# Altium PCB 06-7Segment(MAX7219).PcbDoc
Units mm, origin at the board's own origin, x right, y up, seen from the top; angles counter-clockwise.
Board outline 40 x 40 mm, 4 copper layers (Top Layer, Internal Plane 1, Internal Plane 2, Bottom Layer), stack 0.462 mm thick; 14 components, 29 nets, 93 pads, 16 vias.
Unrouted connection lines stored in the file: 50.
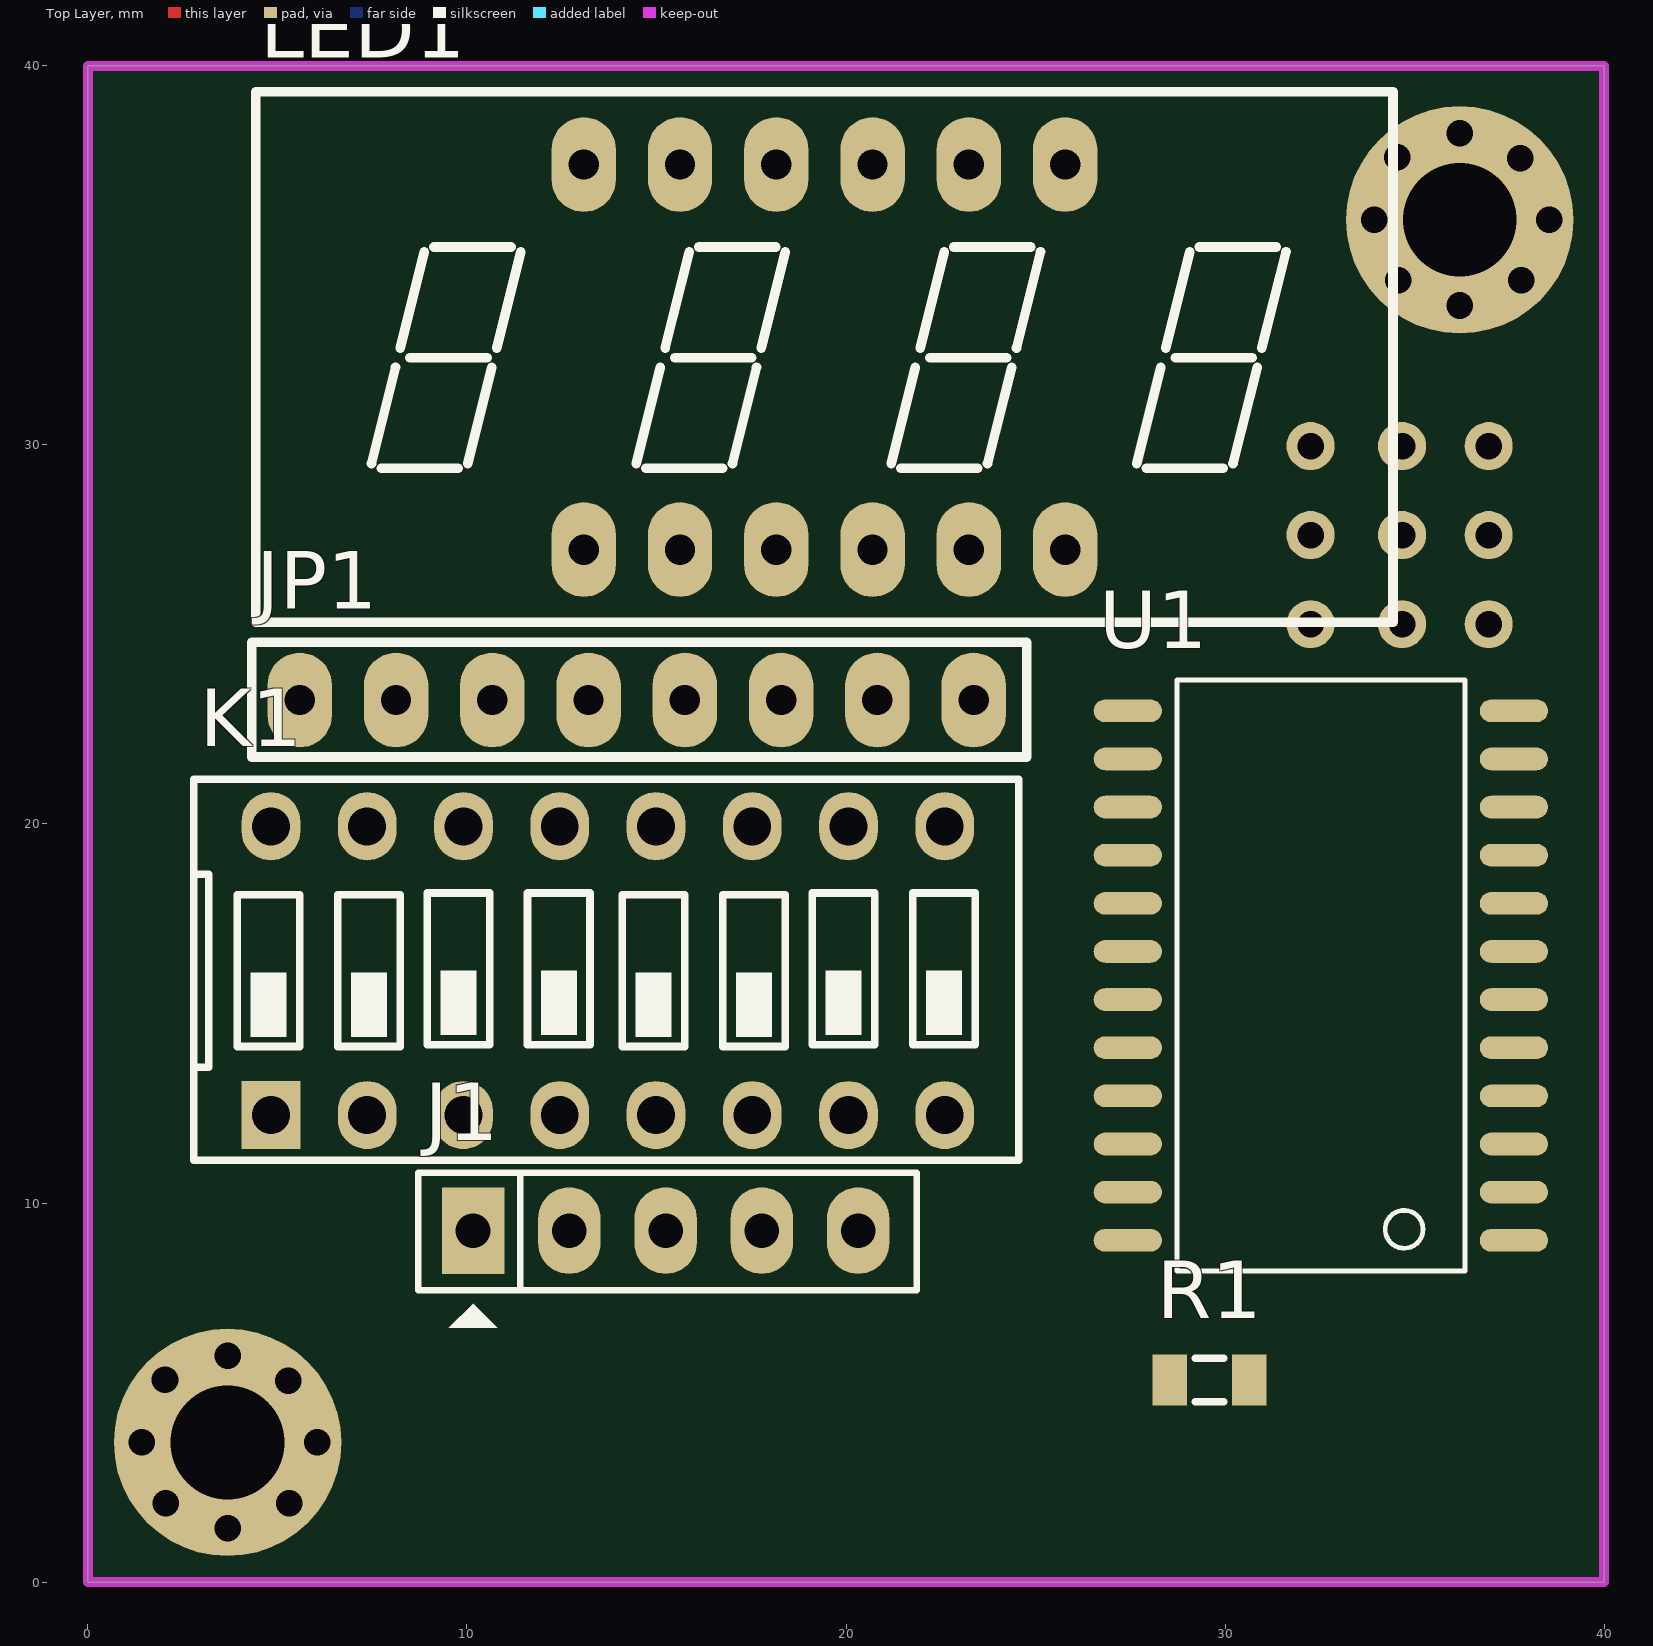
[diagram p0: Top Layer view]
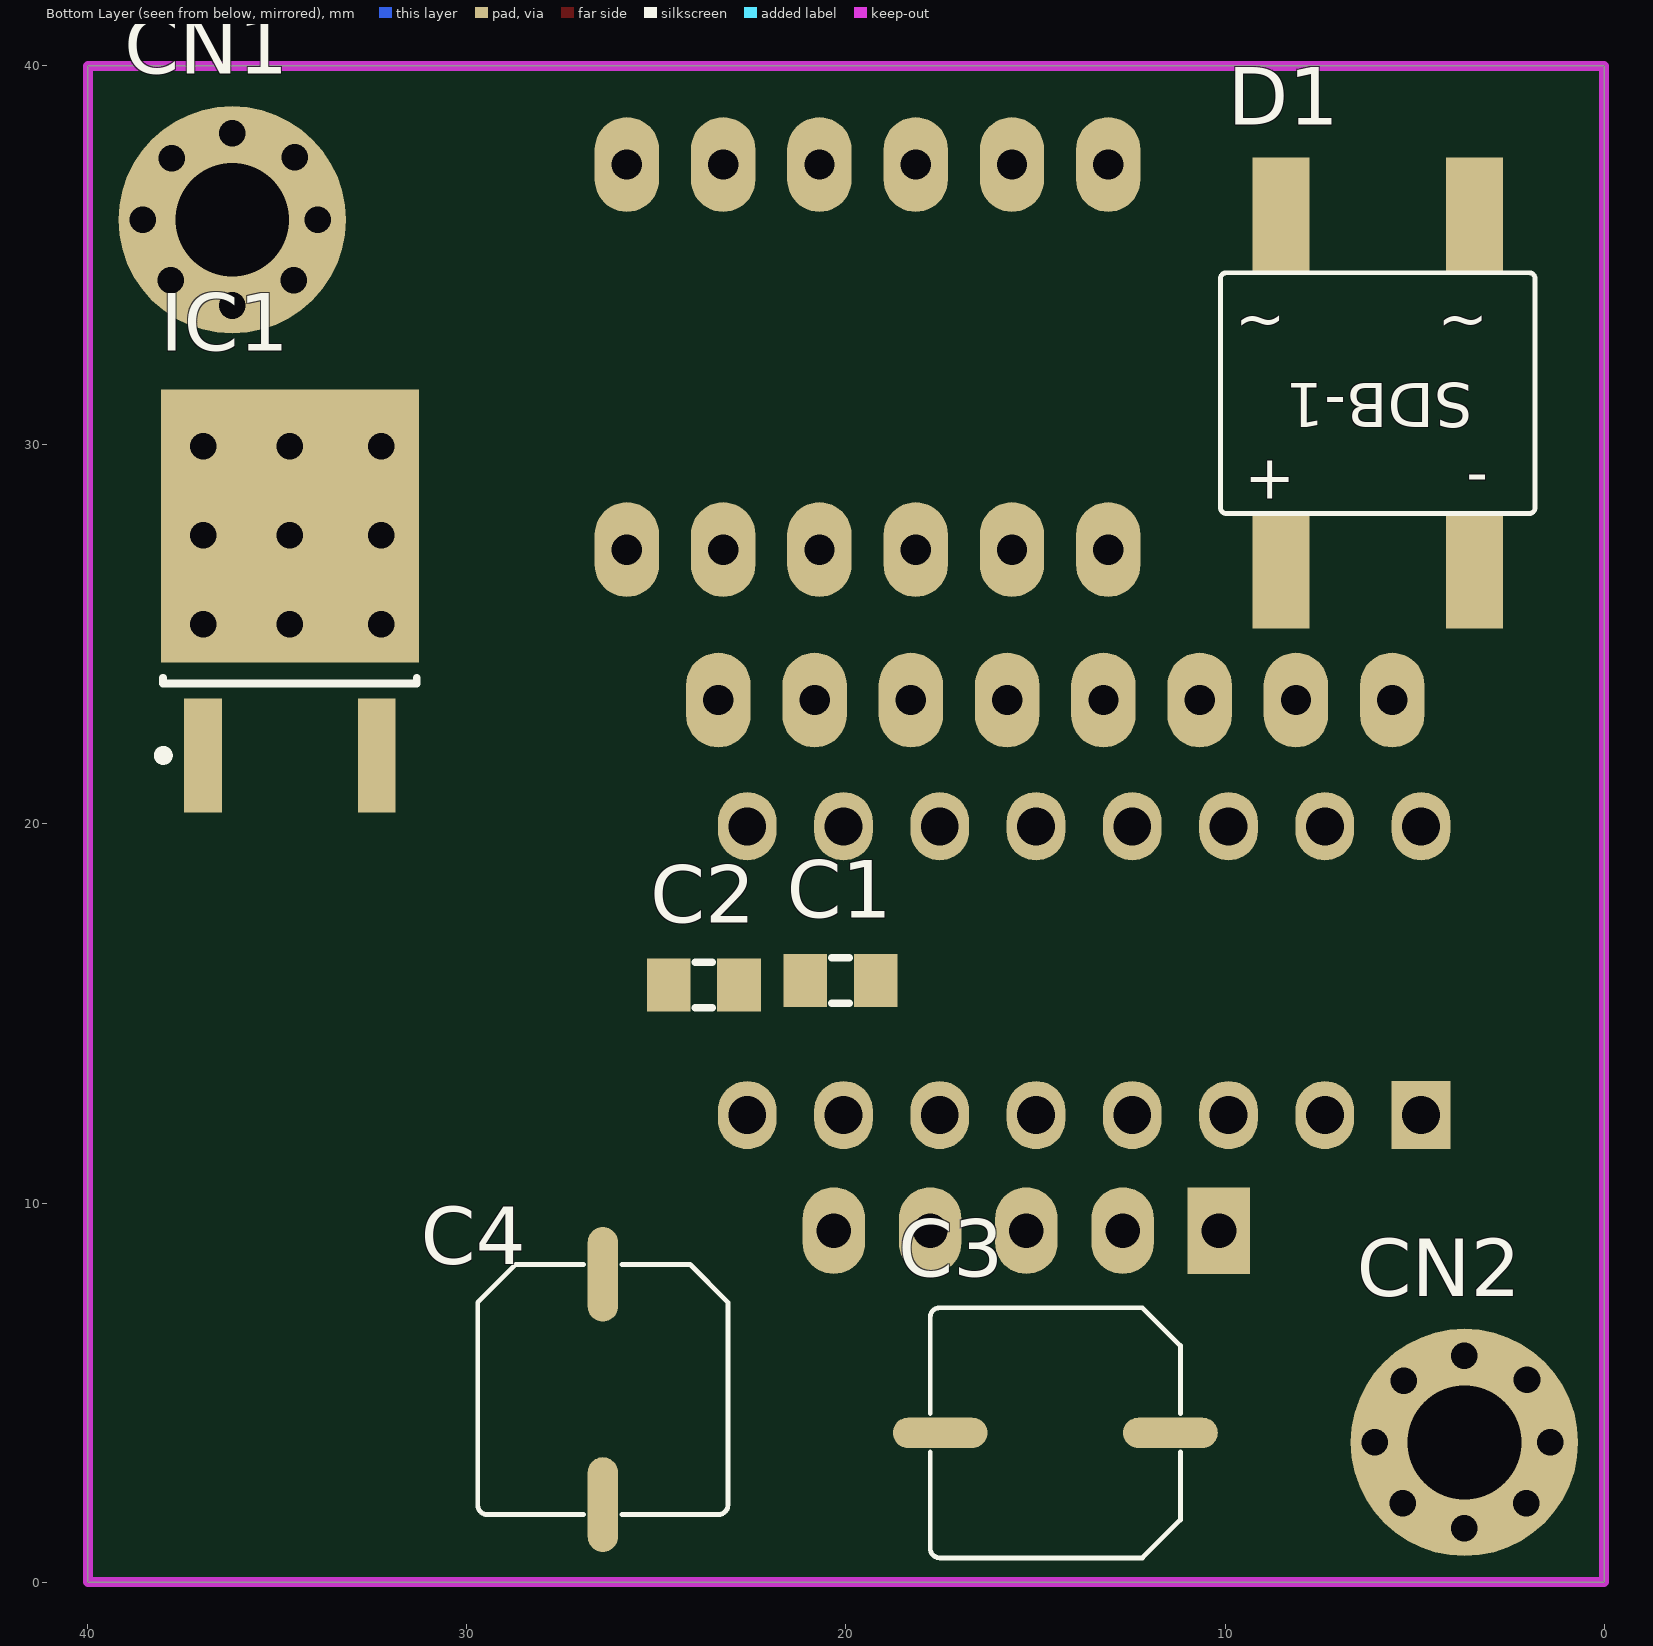
[diagram p1: Bottom Layer view, seen from below]
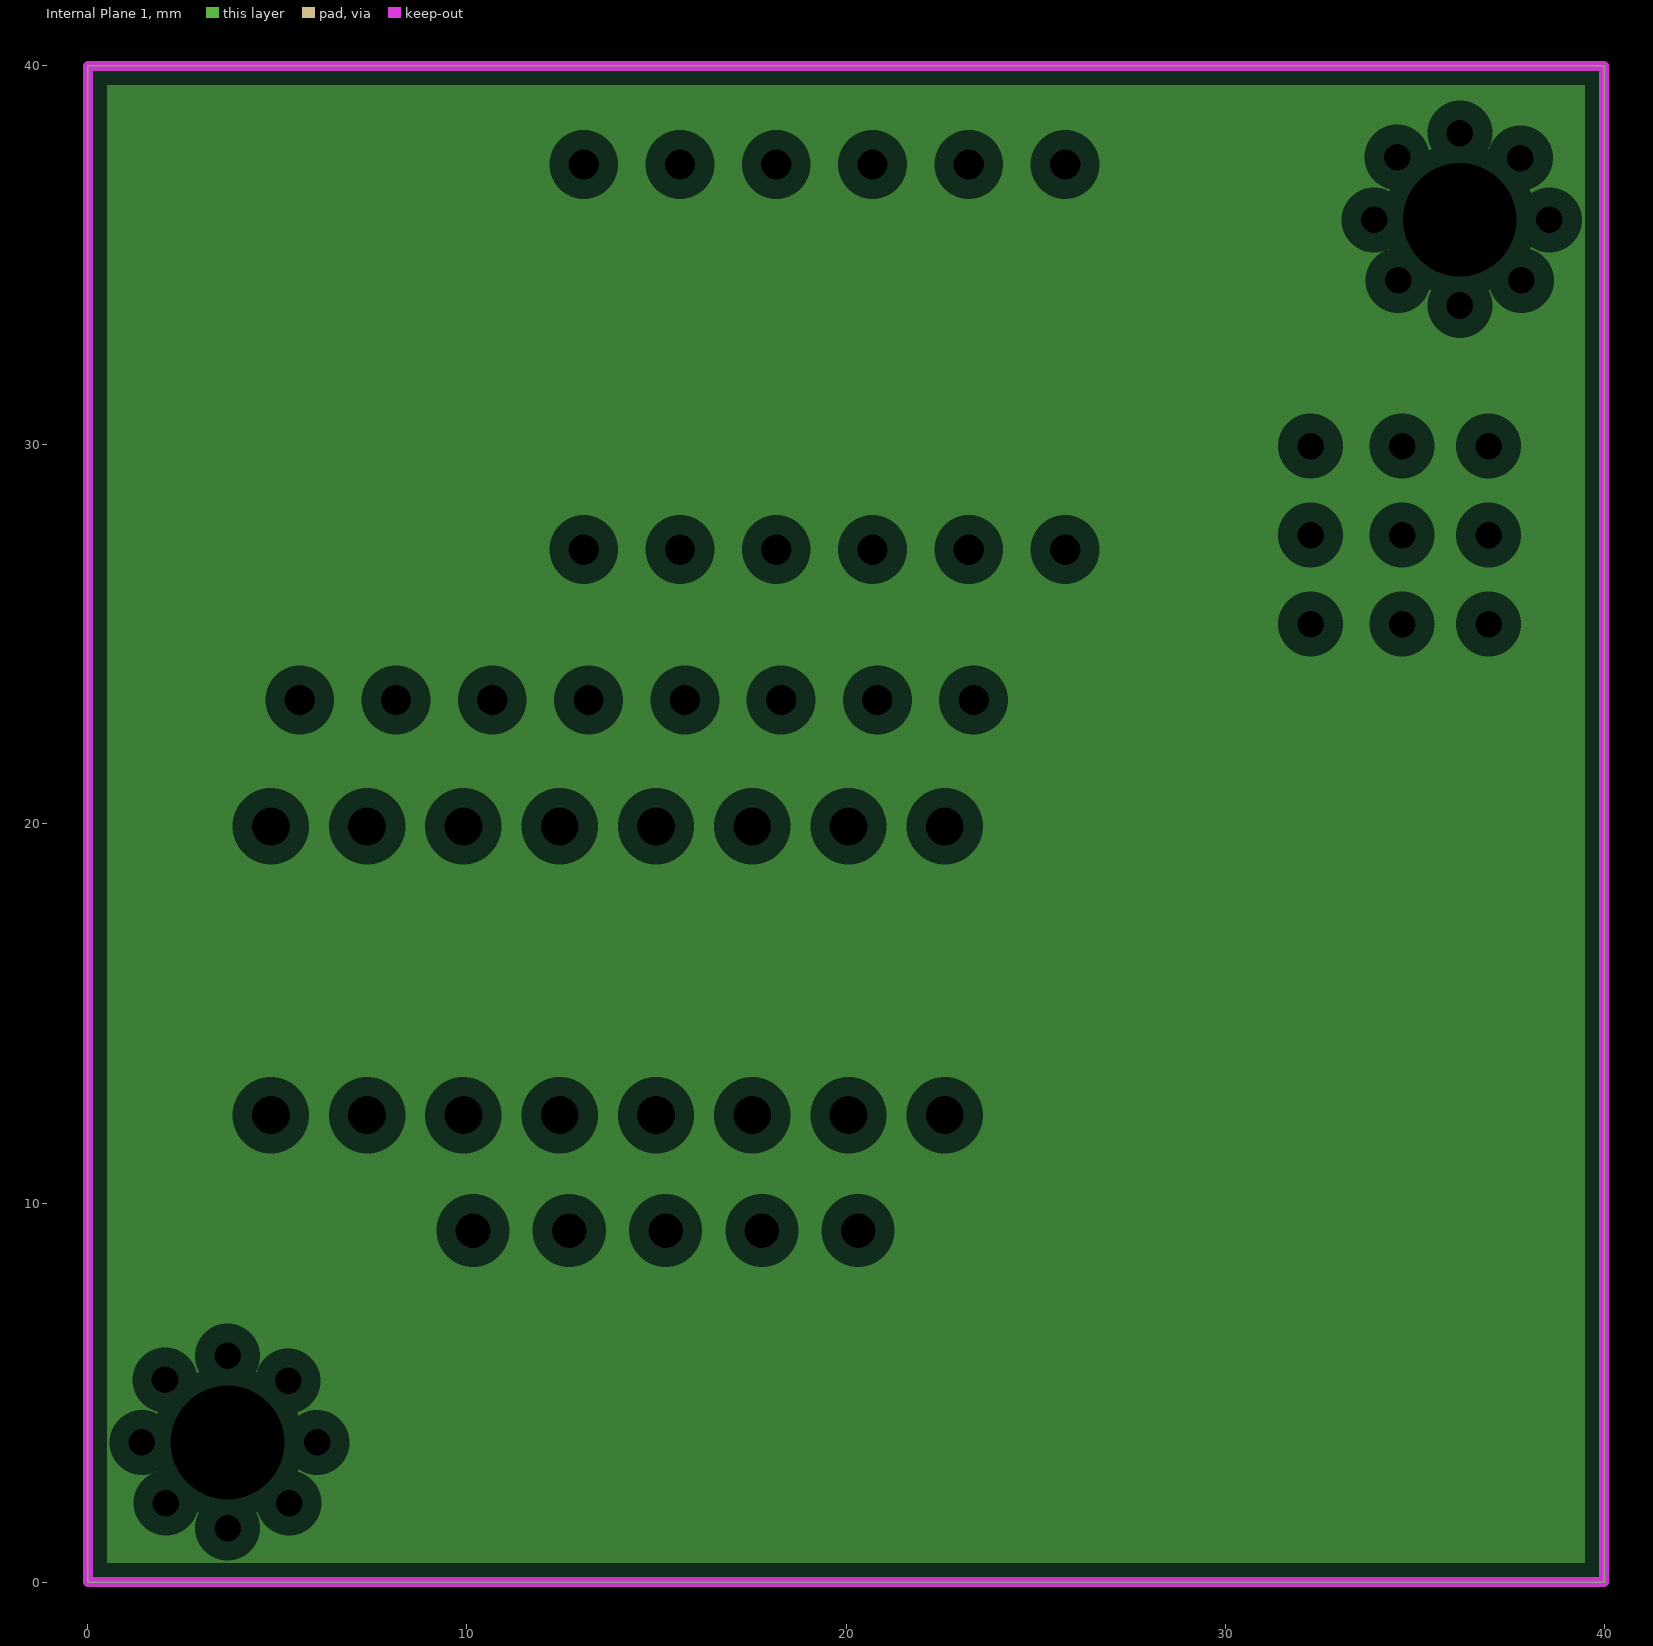
[diagram p2: Internal Plane 1, clearances drawn from the general rule]
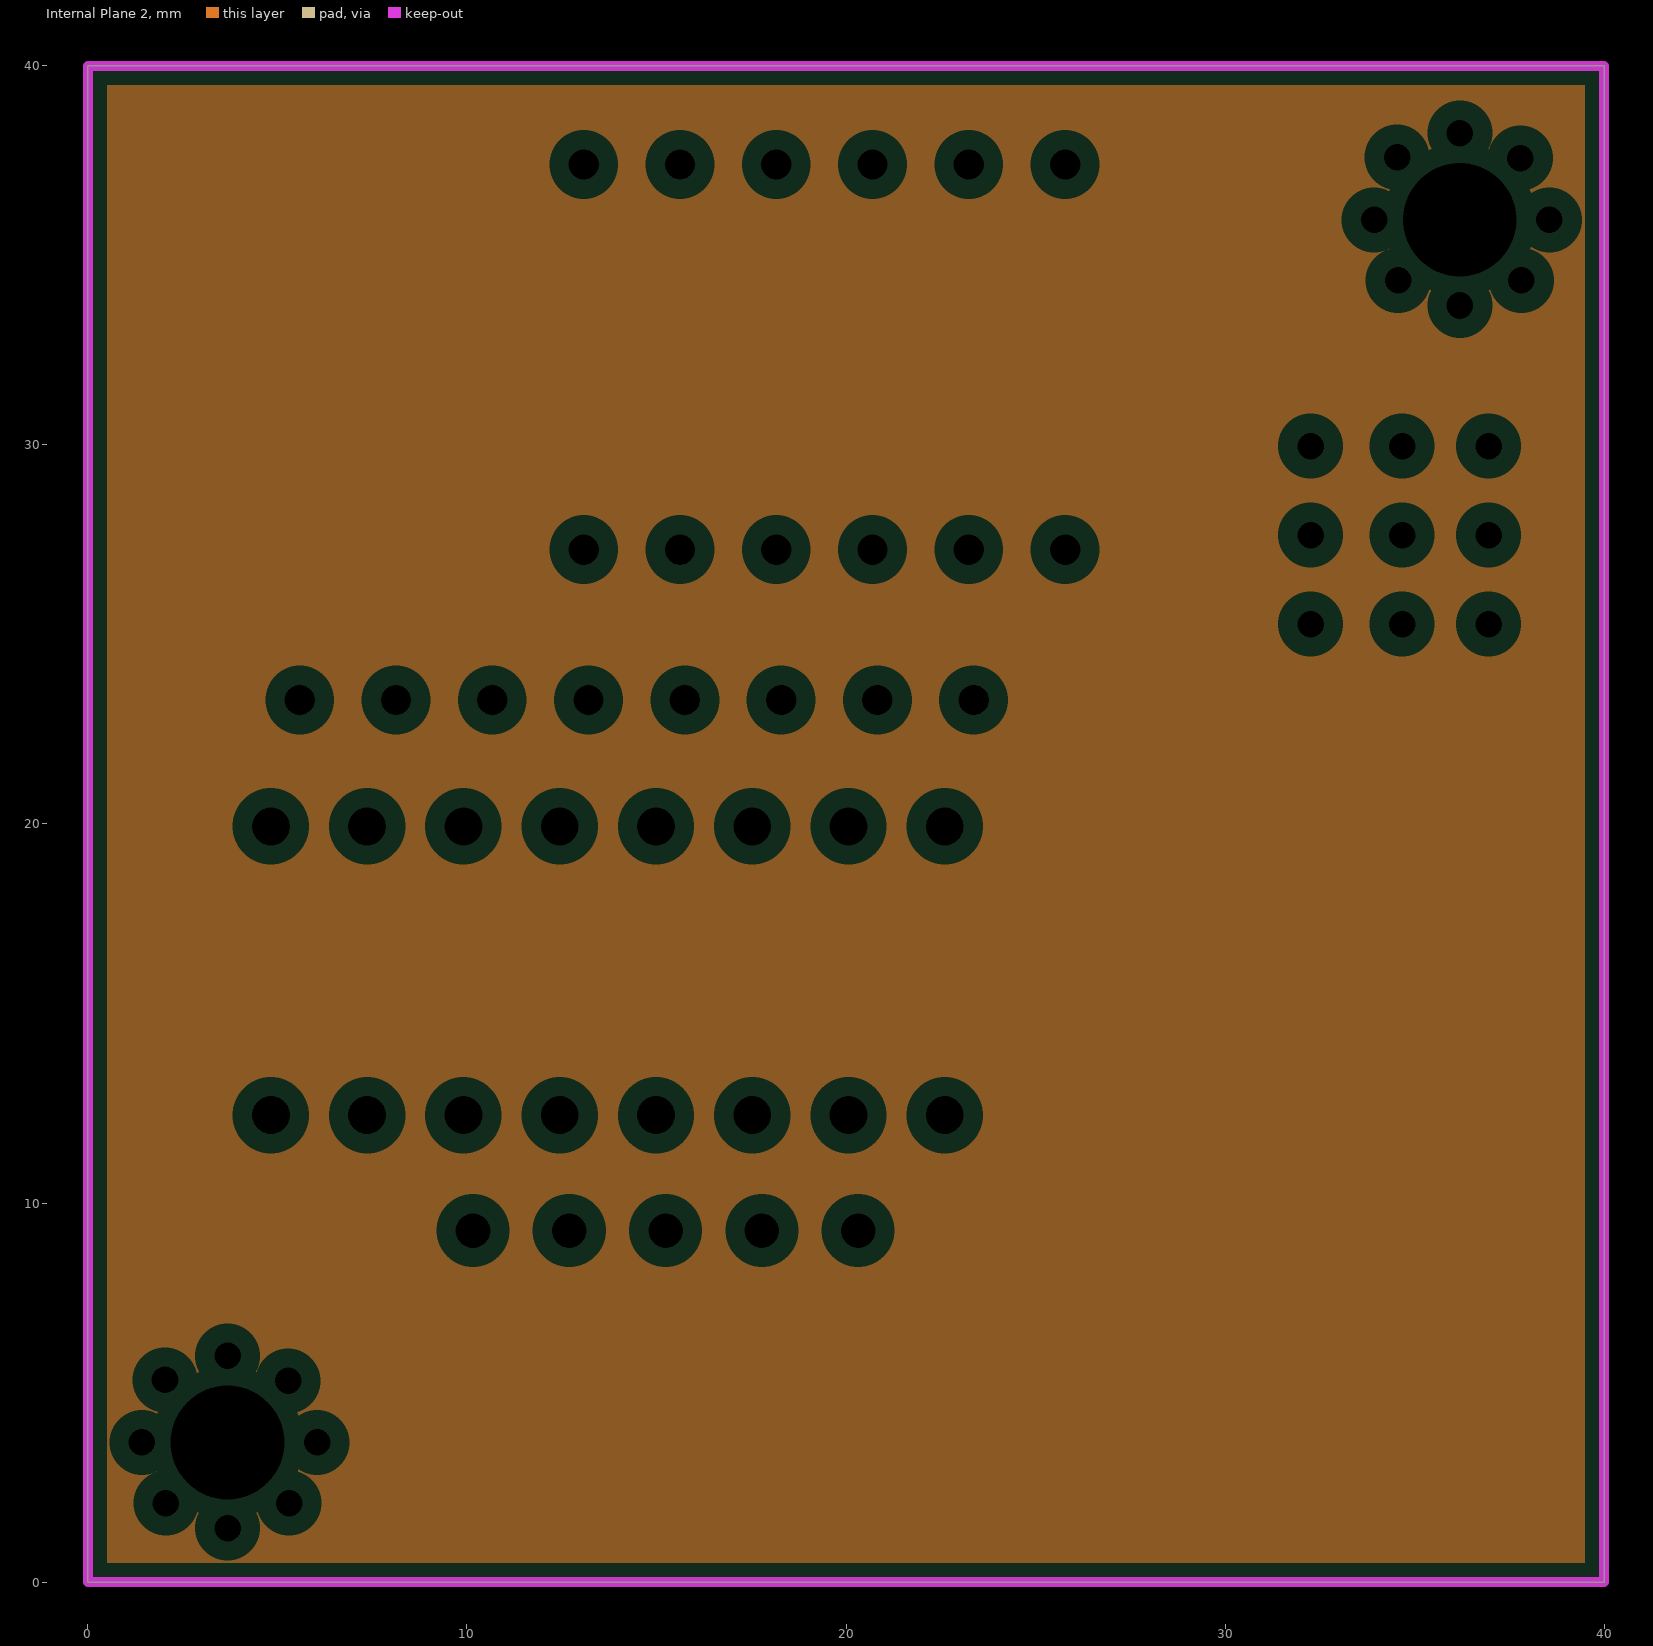
[diagram p3: Internal Plane 2, clearances drawn from the general rule]

## Layer stack, top to bottom
Top Solder: solder mask 0.0102, Solder Resist, Dk 3.5
Top Layer: signal copper 0.0356
Internal Plane 1: plane copper 0.0356
Internal Plane 2: plane copper 0.0356
Dielectric 1: dielectric 0.32, FR-4, Dk 4.8
Bottom Layer: signal copper 0.0356
Bottom Solder: solder mask 0.0102, Solder Resist, Dk 3.5

## Board outline
0,0 40,0 40,40 0,40

## Design rules (kind name [scope] priority, off if disabled: settings)
Clearance [All] p1: gap=0.2
PlaneClearance [All] p1: clearance=0.508
PlaneConnect [All] p1: planeconnectstyle=Relief reliefexpansion=0.508 reliefentries=4 reliefconductorwidth=0.254 reliefairgap=0.254
PolygonConnect [All] p1: connectstyle=Relief reliefconductorwidth=0.254 reliefentries=4 polygonreliefangle="90 Angle" airgapwidth=0.254
RoutingVias [All] p1: holewidth=0.6 width=1 viastyle="Through Hole" minholewidth=0.711 minwidth=1.27 maxholewidth=0.711 maxwidth=1.27
SolderMaskExpansion [All] p1: expansion=0.102
Width [All] p1: maxlimit=0.2 minlimit=0.2 preferedwidth=0.2
28 further rules are at their usual default settings.

## Components (designator, comment, footprint, x,y, rotation, side; value= is the part's Value field where it differs from the comment)
C1 "104" C-0805 20.145,15.875 r0 bottom
C2 "104" C-0805 23.749,15.748 r0 bottom
C3 "10uF" C-ALU-D6.5 14.478,3.937 r270 bottom
C4 "10uF" C-ALU-D6.5 26.416,5.08 r180 bottom
CN1 "COCDONGM3" M3 36.195,35.941 r180 bottom
CN2 "COCDONGM3" M3 3.683,3.683 r180 bottom
D1 "DB 1A" D-DB-1A-SMD 5.969,31.369 r0 bottom
IC1 "ASM1117" TO-252 34.671,25.908 r90 bottom
J1 "JP5" JP5 10.16,9.271 r0 top
JP1 "JP8 PIN" JP8-2.54 23.368,23.269 r180 top
K1 "SW - DIP8" SW-DIP-16 13.716,16.129 r0 top
LED1 "7SEG-MXP4-CC" "7seg4 - 0.36 GREEN" 4.431,25.32 r0 top
R1 "10k" R-0805 29.591,5.334 r180 top
U1 "MAX7219" SOIC-24-W 32.53,16.002 r90 top

## Footprints (in the part's own frame and the unit in brackets; to place one, negate y for a bottom-side part, rotate by r counter-clockwise, add the part's x,y. Pads: shape width x height; smd on the part's side, far side on the other; paste and mask are expansions set on the pad)
"7seg4 - 0.36 GREEN" [mm]
  oval 1.7x2.5 hole 0.8: 1(8.65,1.92) 2(11.19,1.92) 3(13.73,1.92) 4(16.27,1.92) 5(18.81,1.92) 6(21.35,1.92) 7(21.35,12.08) 8(18.81,12.08) 9(16.27,12.08) 10(13.73,12.08) 11(11.19,12.08) 12(8.65,12.08)
  silkscreen extent 0,0 30,14, body extent 0,0 30,14, height 7.21
C-0805 [mm] "Chip Capacitor, 2-Leads, Body 2.0x1.3mm, IPC Medium Density"
  rect 1.15x1.4 smd: 1(-0.925,0) 2(0.925,0)
  silkscreen extent -0.22,-0.6 0.23,0.6, body extent -1,-0.62 1,0.62, height 0.5
C-ALU-D6.5 [mm] "6.3x5.4mm"
  oval 0.8x2.5 smd: 1(0,3.038) 2(0,-3.038)
  silkscreen extent -3.3,-3.3 3.3,3.3, body extent -3.3,-3.8 3.3,3.8, height 6.25
D-DB-1A-SMD [mm] "DB106S"
  rect 1.5x3 smd: 1(-2.55,-4.713) 2(2.55,-4.713) 3(2.55,4.713) 4(-2.55,4.713)
  silkscreen extent -4.15,-3.18 4.15,3.18, body extent -4.15,-4.95 4.15,4.95, height 3.35
JP5 [mil] "JP5"
  rect 65x90 hole 36: 1(0,0)
  oval 65x90 hole 36: 2(100,0) 3(200,0) 4(300,0) 5(400,0)
  silkscreen extent -57,-101 461,60, body extent -48,-53 448,45, height 323
JP8-2.54 [mm]
  oval 1.7x2.5 hole 0.8: 1(0,0) 2(2.54,0) 3(5.08,0) 4(7.62,0) 5(10.16,0) 6(12.7,0) 7(15.24,0) 8(17.78,0)
  silkscreen extent -1.4,-1.52 19.05,1.5, body extent -1.27,-1.27 19.05,1.27, height 9.5
M3 [mm]
  round 6 hole 3: 1(0,0)
R-0805 [mm] "Chip Resistor, 2-Leads, Body 2.0x1.3mm, IPC Medium Density"
  rect 0.9x1.35 smd: 1(-1.05,0) 2(1.05,0)
  silkscreen extent -0.38,-0.58 0.38,0.58, body extent -1,-0.63 1,0.63, height 0.5
SOIC-24-W [mm]
  oval 0.6x1.8 smd: 1(-6.985,-5.094) 2(-5.715,-5.094) 3(-4.445,-5.094) 4(-3.175,-5.094) 5(-1.905,-5.094) 6(-0.635,-5.094) 7(0.635,-5.094) 8(1.905,-5.094) 9(3.175,-5.094) 10(4.445,-5.094) 11(5.715,-5.094) 12(6.985,-5.094) 13(6.985,5.094) 14(5.715,5.094) 15(4.445,5.094) 16(3.175,5.094) 17(1.905,5.094) 18(0.635,5.094) 19(-0.635,5.094) 20(-1.905,5.094) 21(-3.175,5.094) 22(-4.445,5.094) 23(-5.715,5.094) 24(-6.985,5.094)
  silkscreen extent -7.8,-3.8 7.8,3.8, body extent -7.8,-5.35 7.8,5.35, height 2.65
SW-DIP-16 [mm]
  rect 1.55x1.8 hole 1: 1(-8.89,-3.81)
  oval 1.55x1.8 hole 1: 2(-6.35,-3.81) 3(-3.81,-3.81) 4(-1.27,-3.81) 5(1.27,-3.81) 6(3.81,-3.81) 7(6.35,-3.81) 8(8.89,-3.81) 9(8.89,3.81) 10(6.35,3.81) 11(3.81,3.81) 12(1.27,3.81) 13(-1.27,3.81) 14(-3.81,3.81) 15(-6.35,3.81) 16(-8.89,3.81)
  silkscreen extent -10.93,-5 10.84,5.05, body extent -10.84,-4.95 10.84,4.95, height 7
TO-252 [mm] "AMS1117"
  rect 3x1 smd: 1(-4.1,2.29) 3(-4.1,-2.29)
  round 1.27 hole 0.7: 2(-0.635,-2.413) 2(-0.635,0) 2(-0.635,2.286) 2(1.714,-2.413) 2(1.714,0) 2(1.714,2.286) 2(4.064,-2.413) 2(4.064,0) 2(4.064,2.286)
  rect 7.2x6.8 smd: 2(1.95,0)
  silkscreen extent -4.22,-3.35 -2.05,3.47, body extent -4.55,-3.37 5.36,3.37, height 2.39

## Part data
C1 C2: library part CN
C3 C4: library part CP1, "Cap P  0,1uF < 22uF , 16 - 50V"
D1: library part DB
IC1: library part LM78xx, "On ap +, from + 5 to + 24VDC"
JP1: library part JP8
K1: library part SWDIP-8, "DIP Switch, 8 Position, SPST"
LED1: library part 7SEG-MXP4-CA, "Four 7-segment led"
R1: library part R, "Resistor 1/4W"

## Via types
v1: diameter 1, hole 0.7, Top Layer to Bottom Layer, 16 vias

## Nets (pads, with @x,y where several pads share a name; then routed paths per layer and width w, separated by ;. In a path a pad name is that pad's centre, name@x,y a point inside that pad or via, vN(x,y) a via of type N, cw(c..) or ccw(c..) an arc to the next point about the centre after c; other vN are vias at no path point)
+5V: C2.2 C4.1 IC1.3 J1.5 R1.1 U1.19
+12V: C1.2 C3.1 D1.3 IC1.1
A: JP1.8 K1.16 LED1.11
B: JP1.7 K1.15 LED1.7
C: JP1.6 K1.14 LED1.4
CLK: J1.3 U1.12
D: JP1.5 K1.13 LED1.2
DS: J1.4 U1.1
E: JP1.4 K1.12 LED1.1
F: JP1.3 K1.11 LED1.10
G: JP1.2 K1.10 LED1.5
GND: C1.1 C2.1 C3.2 C4.2 D1.4 IC1.2 J1.1 U1.4 U1.9
H: JP1.1 K1.9 LED1.3
LAT: J1.2 U1.13
NetCN1_1: CN1.1 D1.1
  other v1: 36.195,33.68 34.569,34.341 37.821,34.341 33.934,35.941 38.557,35.941 37.795,37.567 34.544,37.592 36.195,38.227
NetCN2_1: CN2.1 D1.2
  other v1: 3.683,1.422 2.057,2.083 5.309,2.083 1.422,3.683 6.045,3.683 5.283,5.309 2.032,5.334 3.683,5.969
NetK1_1: K1.1 U1.14
NetK1_2: K1.2 U1.16
NetK1_3: K1.3 U1.20
NetK1_4: K1.4 U1.23
NetK1_5: K1.5 U1.21
NetK1_6: K1.6 U1.15
NetK1_7: K1.7 U1.17
NetK1_8: K1.8 U1.22
NetR1_2: R1.2 U1.18
SEG1: LED1.6 U1.2
SEG2: LED1.8 U1.11
SEG3: LED1.9 U1.6
SEG4: LED1.12 U1.7
pads on no net: U1.3 U1.5 U1.8 U1.10 U1.24

## Keep-outs
Keep-Out Layer:
  the board outline again, w0.254

## Text inside footprints (layer, text, board x,y; h text height)
D1: Bottom Overlay "~        ~" at 3.048,34.163 h2 r180; Bottom Overlay "-         +" at 3.048,29.972 h2 r180; Bottom Overlay "SDB-1" at 3.461,32.009 h2 r180